# Altium PCB main.PcbDoc
Units mil, origin at the board's own origin, x right, y up, seen from the top; angles counter-clockwise.
Board outline 6000 x 4000 mil, 2 copper layers (Top Layer, Bottom Layer); 22 components, 11 nets, 84 pads, 0 vias.
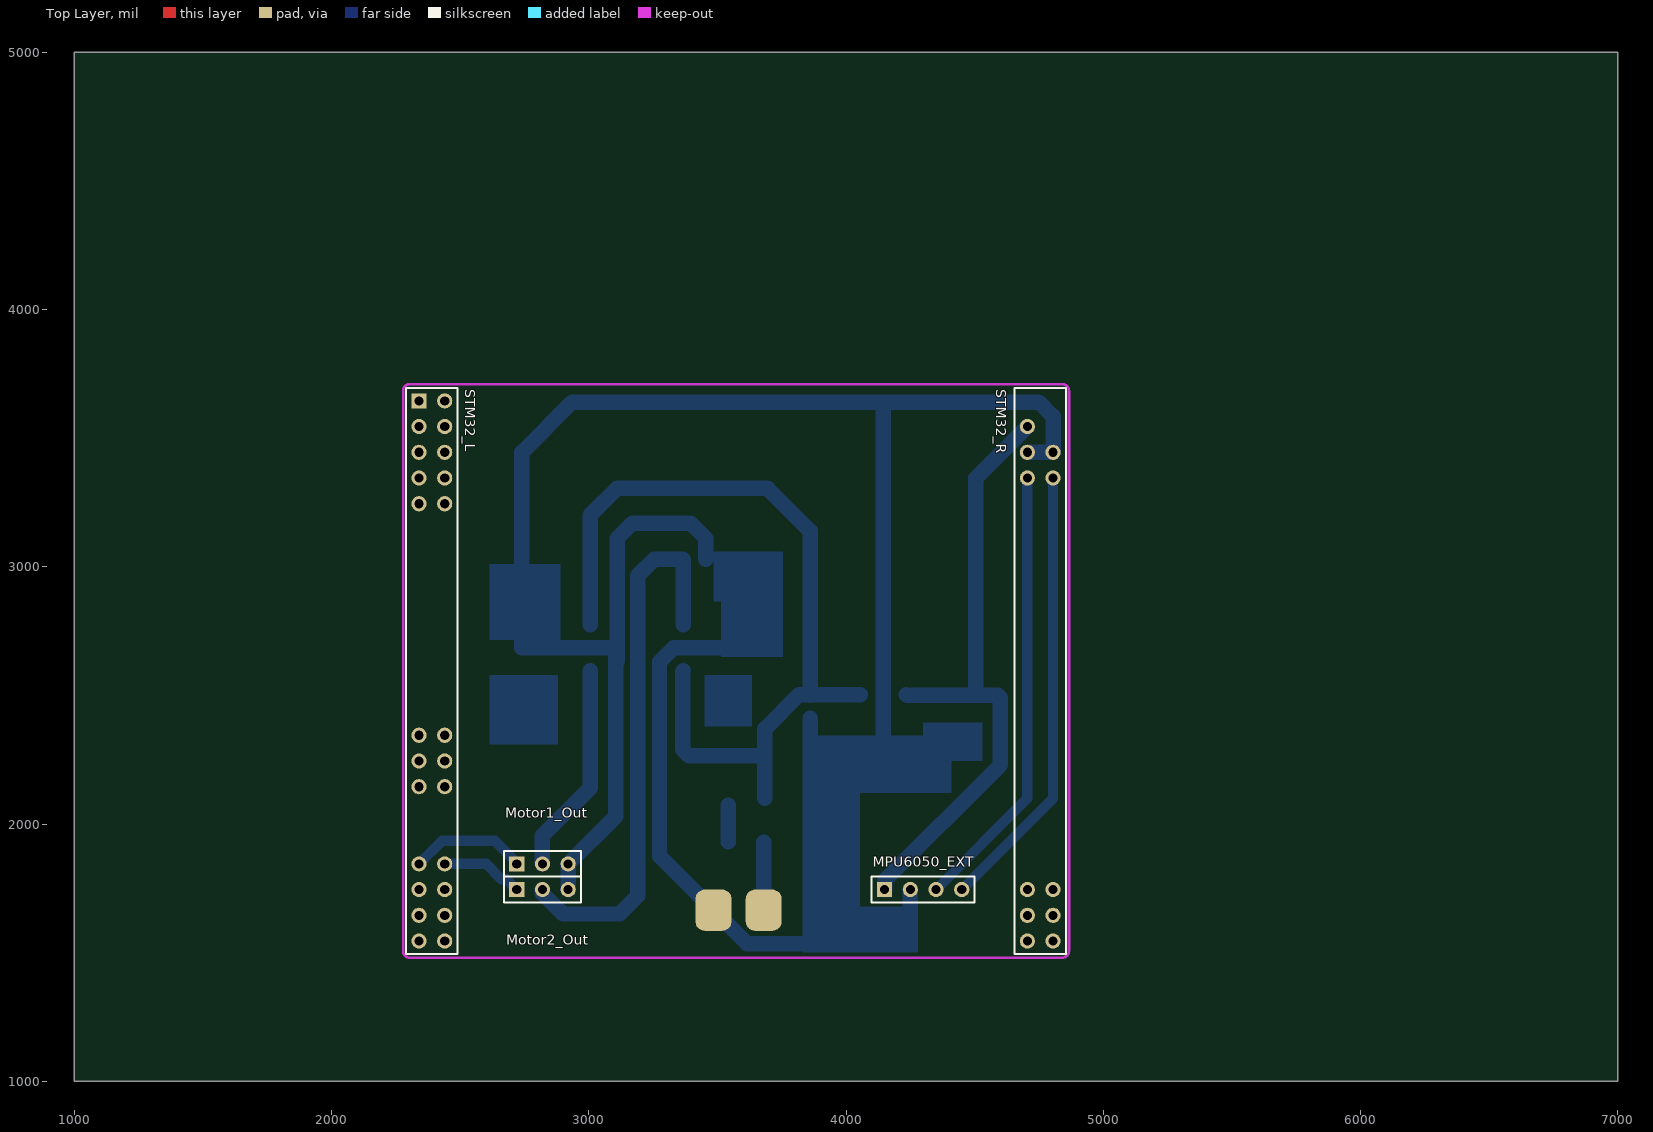
[diagram p0: Top Layer view]
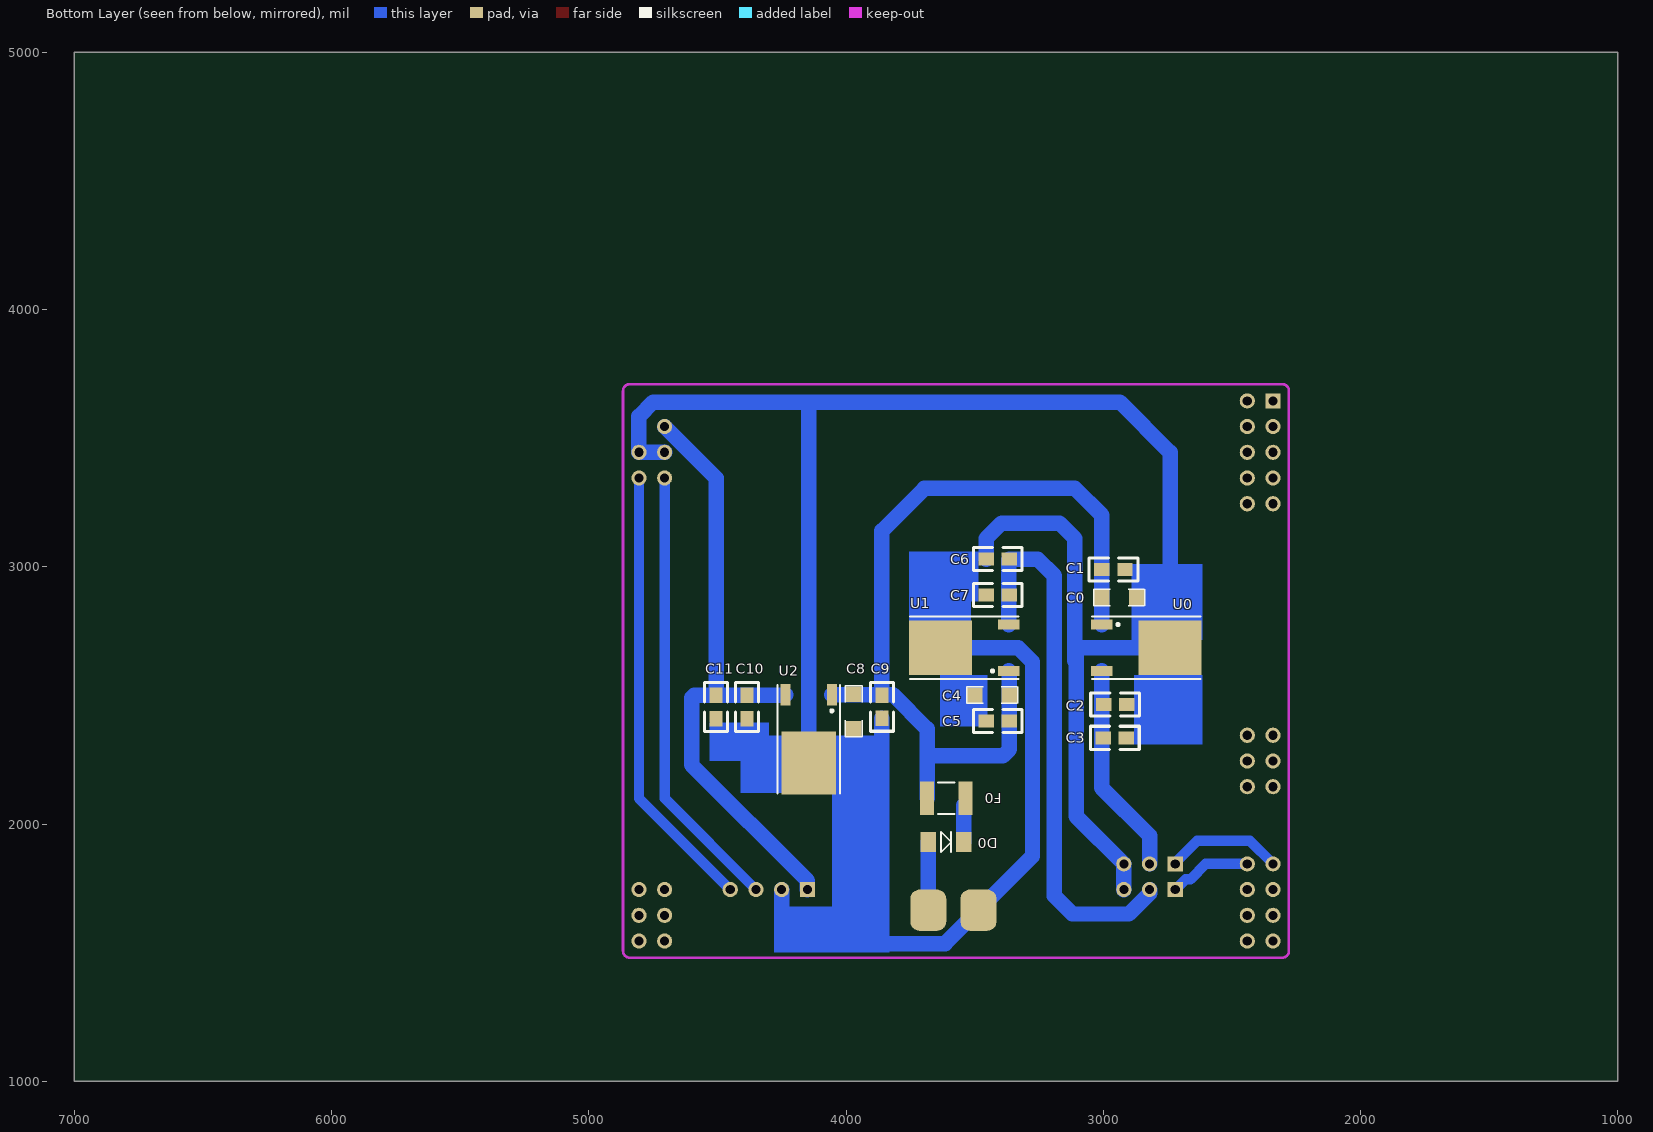
[diagram p1: Bottom Layer view, seen from below]

## Layer stack, top to bottom
Top Solder: solder mask 0.4, Solder Resist, Dk 3.5
Top Layer: signal copper 1.4
Dielectric 1: dielectric 12.6, FR-4, Dk 4.8
Bottom Layer: signal copper 1.4
Bottom Solder: solder mask 0.4, Solder Resist, Dk 3.5

## Board outline
1000,1000 7000,1000 7000,5000 1000,5000

## Design rules (kind name [scope] priority, off if disabled: settings)
Clearance [All] p1: gap=10
PolygonConnect [All] p1: connectstyle=Relief reliefconductorwidth=10 reliefentries=4 polygonreliefangle="90 Angle" airgapwidth=10
RoutingVias [All] p1: holewidth=28 width=50 viastyle="Through Hole" minholewidth=28 minwidth=50 maxholewidth=28 maxwidth=50
SolderMaskExpansion [All] p1: expansion=4
Width [All] p1: maxlimit=80 minlimit=40 preferedwidth=40
30 further rules are at their usual default settings.

## Classes and differential pairs
component class main: C8 C9 C10 C11 D0 F0 Motor1_Out Motor2_Out MPU6050_EXT STM32_L U2

## Components (designator, comment, footprint, x,y, rotation, side; value= is the part's Value field where it differs from the comment)
C0 "Cap Pol1" 1206A 3005.04,2881.18 r180 bottom
C1 "Cap Semi" 0805 2915,2990 r0 bottom
C2 "Cap Semi" 0805 2908.02,2465.24 r0 bottom
C3 "Cap Semi" 0805 2909.59,2335.24 r0 bottom
C4 "Cap Pol1" 1206A 3365,2500 r0 bottom
C5 "Cap Semi" 0805 3455.41,2399.76 r180 bottom
C6 "Cap Semi" 0805 3455.41,3029.76 r180 bottom
C7 "Cap Semi" 0805 3455.41,2889.76 r180 bottom
C8 "Cap Pol1" 1206A 3968.82,2505.04 r270 bottom
C9 "Cap Semi" 0805 3860,2410 r90 bottom
C10 "Cap Semi" 0805 4384.76,2409.59 r90 bottom
C11 "Cap Semi" 0805 4504.76,2409.59 r90 bottom
D0 "Diode" DIODE-1206 3680,1930 r180 bottom
F0 "Fuse 2" 1812 3610,2100 r0 bottom
Motor1_Out "Header 3" HDR1X3 2720,1845 r0 top
Motor2_Out "Header 3" HDR1X3 2720,1745 r0 top
MPU6050_EXT "Header 4" HDR1X4 4150,1745 r0 top
STM32_L "Header 22X2" HDR2X22#1 2340,3645 r270 top
STM32_R "Header 22X2" HDR2X22#2 4705,3645 r270 top
U0 "L78M05ABDT" TO-252 2872.87,2685 r270 bottom
U1 "L78M05ABDT" TO-252 3500,2685 r90 bottom
U2 "L78M05ABDT" TO-252 4145,2370 r0 bottom

## Footprints (in the part's own frame and the unit in brackets; to place one, negate y for a bottom-side part, rotate by r counter-clockwise, add the part's x,y. Pads: shape width x height; smd on the part's side, far side on the other; paste and mask are expansions set on the pad)
0805 [mil]
  rect 60x50 smd: 1(0.41,0.24) 2(90.41,0.24)
  silkscreen extent -50,-45 140,45
1206A [mil]
  rect 60x60 smd: 1(0.04,-1.18) 2(135.04,-1.18)
  silkscreen extent -32,-33 166,31
1812 [mm] "Chip Capacitor, Body 4.5x3.2mm, IPC High Density"
  rect 1.4x3.3 smd: 1(-1.9,0) 2(1.9,0)
  silkscreen extent -0.8,-1.55 0.8,1.55, body extent -2.4,-1.7 2.4,1.7, height 1.4
DIODE-1206 [mm] "玻璃封装二极管"
  rect 1.5x2 smd: 1(0,0) 2(3.5,0)
  silkscreen extent 1.25,-1 2.25,1
HDR1X3 [mm] "Connector; Header; 3 Position"
  rect 1.5x1.5 hole 0.9: 1(0,0)
  round 1.5 hole 0.9: 2(2.54,0) 3(5.08,0)
  silkscreen extent -1.27,-1.27 6.35,1.27
HDR1X4 [mm] "Connector; Header; 4 Position"
  rect 1.5x1.5 hole 0.9: 1(0,0)
  round 1.5 hole 0.9: 2(2.54,0) 3(5.08,0) 4(7.62,0)
  silkscreen extent -1.27,-1.27 8.89,1.27
HDR2X22#1 [mm] "Connector; Header; 22x2 Position"
  rect 1.5x1.5 hole 0.9: 1(0,0)
  round 1.5 hole 0.9: 2(0,2.54) 3(2.54,0) 4(2.54,2.54) 5(5.08,0) 6(5.08,2.54) 7(7.62,0) 8(7.62,2.54) 9(10.16,0) 10(10.16,2.54) 27(33.02,0) 28(33.02,2.54) 29(35.56,0) 30(35.56,2.54) 31(38.1,0) 32(38.1,2.54) 37(45.72,0) 38(45.72,2.54) 39(48.26,0) 40(48.26,2.54) 41(50.8,0) 42(50.8,2.54) 43(53.34,0) 44(53.34,2.54)
  silkscreen extent -1.27,-1.27 54.61,3.81
HDR2X22#2 [mm] "Connector; Header; 22x2 Position"
  round 1.5 hole 0.9: 3(2.54,0) 5(5.08,0) 6(5.08,2.54) 7(7.62,0) 8(7.62,2.54) 39(48.26,0) 40(48.26,2.54) 41(50.8,0) 42(50.8,2.54) 43(53.34,0) 44(53.34,2.54)
  silkscreen extent -1.27,-1.27 54.61,3.81
TO-252 [mm] "D-PAK/TO-252-AA; 3 Leads (1 Cropped); Body 10.1 (inc. leads) x 6.6 mm (LxW max)"
  rect 1x2.1 smd: 1(-2.285,-3.375) 3(2.285,-3.375)
  rect 5.4x6.2 smd: 4(0,3.375)
  silkscreen extent -3.09,-4.32 3.09,6.38

## Part data
C0 C4 C8: "Polarized Capacitor (Radial)"
C1 C2 C3 C5 C6 C7 C9 C10 C11: "Capacitor (Semiconductor SIM Model)"
D0: "Default Diode"
F0: "Fuse"
Motor1_Out Motor2_Out: "Header, 3-Pin"
MPU6050_EXT: "Header, 4-Pin"
STM32_L STM32_R: "Header, 22-Pin, Dual row"
U0 U1 U2: "Precision 500mA Regulator"

## Free pads (board coordinates)
  rrect50% 140x160 all layers, no hole: 0(3485,1665) 0(3680,1665)

## Nets (pads, with @x,y where several pads share a name; then routed paths per layer and width w, separated by ;. In a path a pad name is that pad's centre, name@x,y a point inside that pad or via, vN(x,y) a via of type N, cw(c..) or ccw(c..) an arc to the next point about the centre after c; other vN are vias at no path point)
5V_1: C2.2 C3.2 Motor1_Out.2 U0.3 | length 827
  Bottom Layer w60: Motor1_Out.2 2820,1955 3005.75,2140.75 3005.75,2465 U0.3
5V_2: C6.2 C7.2 Motor2_Out.2 U1.3 | length 2150
  Bottom Layer w60: Motor2_Out.2 2820,1730 2900,1650 3120,1650 3190,1720 3190,2965 3255,3030 C6.2 3367.13,3027.87 U1.3
5V_3: C10.2 C11.2 MPU6050_EXT.1 STM32_R.3 U2.3 | length 2429.6
  Bottom Layer w60: MPU6050_EXT.1 4150,1780 4600,2230 4600,2490 4590,2500 C11.2 ; U2.3 4237.83,2500 C10.2 C11.2 ; STM32_R.3 4505,3345 C11.2
B4_ROLL: Motor1_Out.1 STM32_L.37 | length 457.5
  Bottom Layer w40: STM32_L.37 2430,1935 2635,1935 2720,1850 Motor1_Out.1
B5_PITCH: Motor2_Out.1 STM32_L.38 | length 321.4
  Bottom Layer w40: STM32_L.38 2600.94,1845 2660.47,1785.47 2679.53,1785.47 Motor2_Out.1
B10_SCL: MPU6050_EXT.3 STM32_R.7 | length 1747
  Bottom Layer w40: MPU6050_EXT.3 4705,2100 STM32_R.7
B11_SDA: MPU6050_EXT.4 STM32_R.8 | length 1747
  Bottom Layer w40: MPU6050_EXT.4 4805,2100 STM32_R.8
GND: C0.2 C1.1 C2.1 C3.1 C4.2 C5.1 C6.1 C7.1 C8.2 C9.1 C10.1 C11.1 Motor1_Out.3 Motor2_Out.3 MPU6050_EXT.2 pad.0@3485,1665 STM32_R.5 STM32_R.6 U0.4 U1.4 U2.4 | length 10118.1
  Bottom Layer w60: Motor2_Out.3 Motor1_Out.3 3105,2030 3105,2680 ; 3110,2635 3110,2675 ; C6.1 3455,3110 3395,3170 3170,3170 3110,3110 3110,2675 ; U1.4 3330,2685 3275,2630 3275,1875 3485,1665 3615,1535 3870,1535 3965,1630 ; C9.1 3860.24,1734.76 3965,1630 ; U2.4 4145,3635 4150,3640 ; MPU6050_EXT.2 4250,1665 4215,1630 3965,1630 ; STM32_R.5 STM32_R.6 4805,3585 4750,3640 4150,3640 ; 3105,2680 3110,2675 ; 3105,2680 3100,2685 U0.4 2740,3445 2935,3640 4150,3640
NetD0_2: D0.2 F0.1 | length 142.8
  Bottom Layer w60: D0.2 F0.1@3542.2,2072.8
VCC: C0.1 C1.2 C4.1 C5.2 C8.1 C9.2 F0.2 U0.1 U1.1 U2.1 | length 3362.5
  Bottom Layer w60: U0.1 3005.75,3200.75 3110,3305 3695,3305 3860.24,3139.76 C9.2@3860.24,2502.87 ; U1.1 3365,2592.91 C5.2 3365,2290 3390,2265 3684.8,2265 ; F0.2 3684.8,2265 ; C9.2 C9.2@3860.24,2502.87 ; U2.1 C9.2@3860.24,2502.87 ; 3684.8,2265 3684.8,2369.8 3817.87,2502.87 C9.2@3860.24,2502.87
VIN: D0.1 pad.0@3680,1665 | length 265
  Bottom Layer w60: pad.0@3680,1665 D0.1
pads on no net: STM32_L.1 STM32_L.2 STM32_L.3 STM32_L.4 STM32_L.5 STM32_L.6 STM32_L.7 STM32_L.8 STM32_L.9 STM32_L.10 STM32_L.27 STM32_L.28 STM32_L.29 STM32_L.30 STM32_L.31 STM32_L.32 STM32_L.39 STM32_L.40 STM32_L.41 STM32_L.42 STM32_L.43 STM32_L.44 STM32_R.39 STM32_R.40 STM32_R.41 STM32_R.42 STM32_R.43 STM32_R.44

## Keep-outs
Keep-Out Layer:
  lines w10: 2278.07,1506.93 ccw(c2305,1506.93) 2305,1480 4840,1480 ccw(c4840,1506.93) 4866.93,1506.93 4866.93,1556.93 4866.93,3683.07 ccw(c4840,3683.07) 4840,3710 2305,3710 ccw(c2305,3683.07) 2278.07,3683.07 2278.07,1506.93

## Other copper
Bottom Layer:
  rectangle net GND: 3830,1680 4055,2130
  rectangle net GND: 3830,1500 4280,1680
  rectangle net GND: 2615,2310 2880,2580
  rectangle net GND: 2615,2715 2890,3010
  rectangle net GND: 4305,2120 4410,2245
  rectangle net GND: 4300,2245 4530,2395
  rectangle net GND: 3835,2120 4305,2345
  rectangle net GND: 3450,2380 3635,2580
  rectangle net GND: 3485,2865 3755,3060
  rectangle net GND: 3515,2650 3755,3055